# EAGLE board ir_module (EAGLE 6.1)
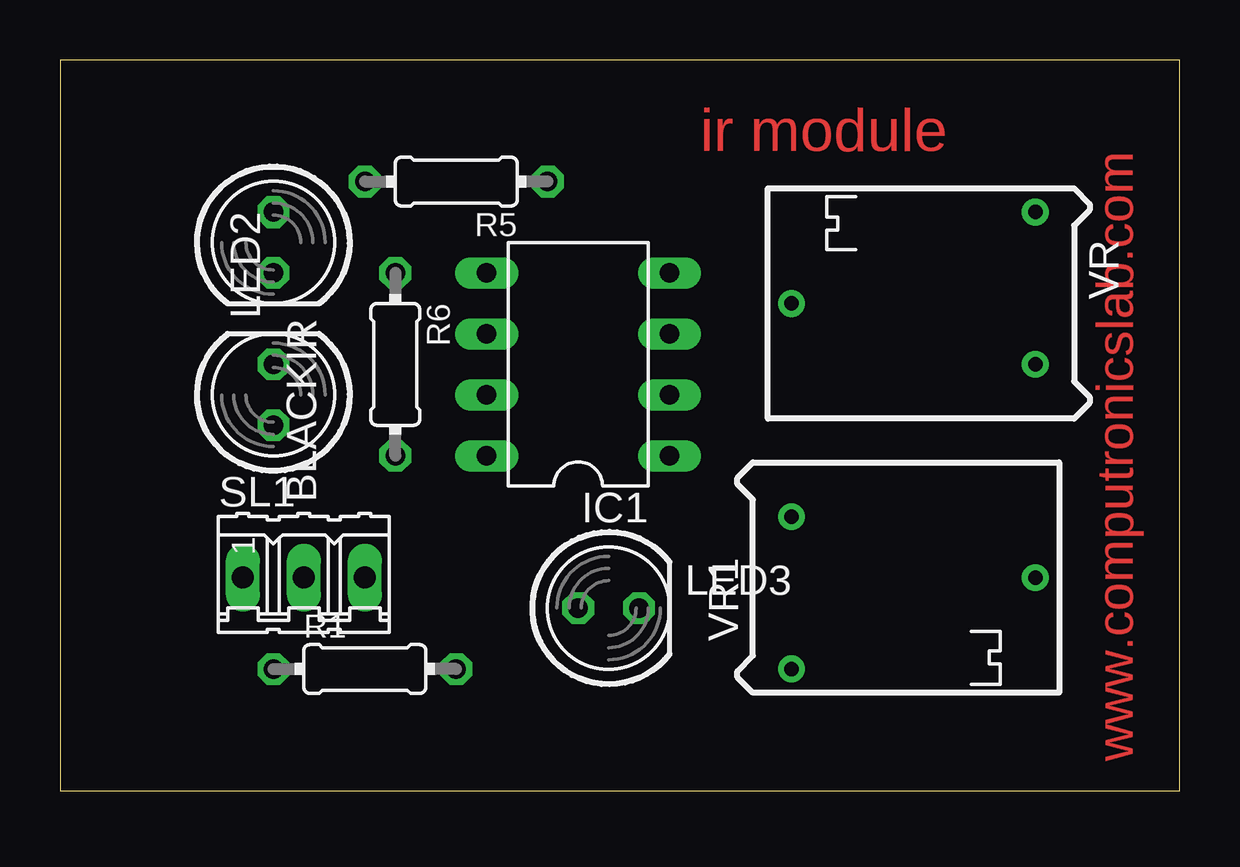
[diagram p0: board, top side]
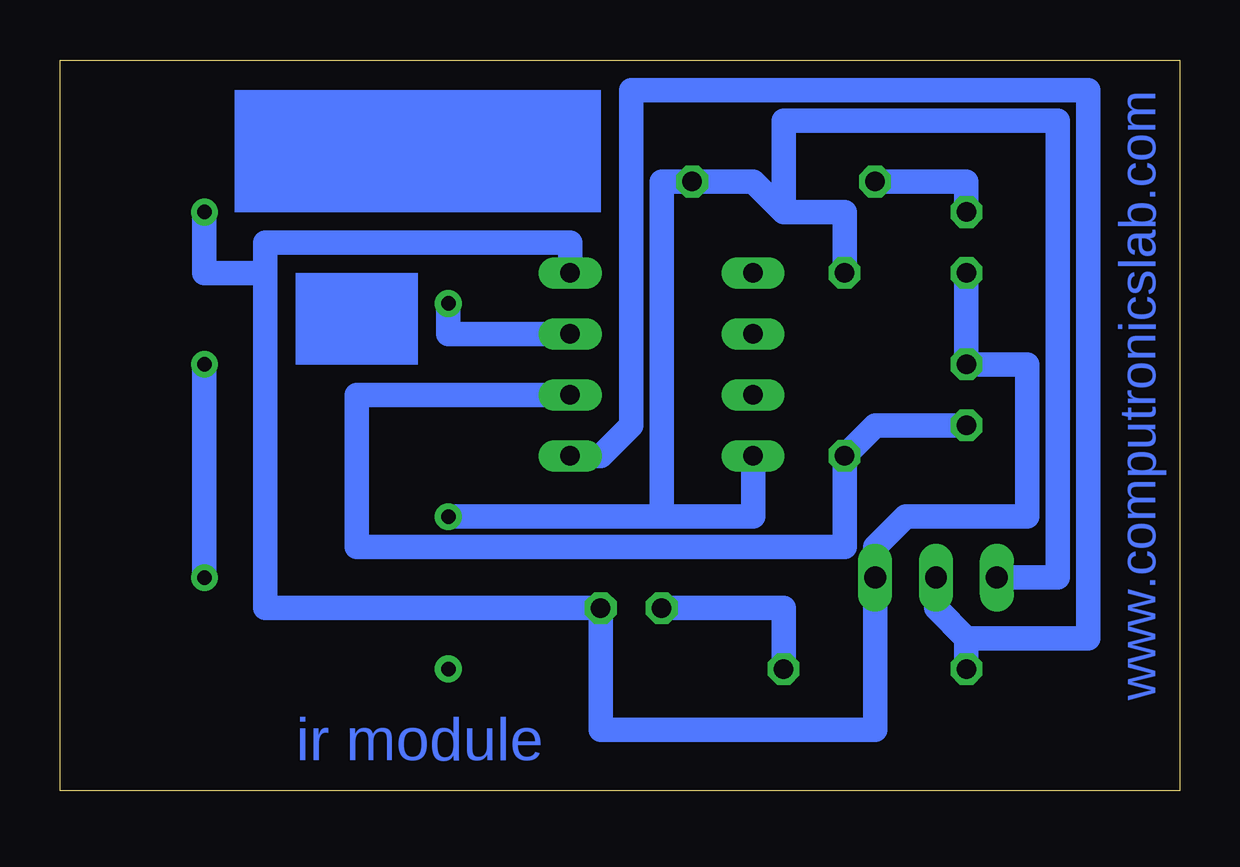
[diagram p1: board, bottom side, seen from below]

Size 46.66 x 30.47 mm. Coordinates in mm from the lower left corner, seen from the top.
Outline: 0,0 46.66,0 46.66,30.47 0,30.47 0,0
Copper layers (1*16): Top 0.035mm / dielectric 1.5mm / Bottom 0.035mm
Design rules: minimum track width 40mil, minimum drill 24mil, track to track 8mil, track to pad 8mil, pad to pad 8mil, via to via 8mil, smd to smd 8mil, copper to edge 40mil, drill to drill 8mil, minimum pad ring 10mil, minimum via ring 8mil, stop-mask expansion 4mil, vias tented up to drill 0mil, thermal gap 10mil

## Footprints (pad centres in the part's own frame; a part is rotated, then mirrored left to right if it is on the bottom)
LED5MM = drill 0.813 octagon: A -1.27,0; K 1.27,0
DIL-08 = drill 0.813 long: 1 -3.81,-3.81; 2 -1.27,-3.81; 3 1.27,-3.81; 4 3.81,-3.81; 5 3.81,3.81; 6 1.27,3.81; 7 -1.27,3.81; 8 -3.81,3.81
0204/7 = drill 0.813 octagon: 1 -3.81,0; 2 3.81,0
03P = drill 0.914 long: 1 -2.54,0; 2 0,0; 3 2.54,0
RTRIM64P = drill 0.61: 1 -2.54,-3.81; 2 7.62,0; 3 -2.54,2.54

## Placement (x,y rotation side)
BLACKIR  5mm  [LED5MM]  8.89,22.86 270 top
IC1  358  [DIL-08]  21.59,17.78 90 top
LED2  5mm  [LED5MM]  8.89,16.51 90 top
LED3  5mm  [LED5MM]  22.86,7.62 0 top
R1  1K  [0204/7]  12.7,5.08 0 top
R5  1K  [0204/7]  16.51,25.4 180 top
R6  10K  [0204/7]  13.97,17.78 270 top
SL1  [03P]  10.16,8.89 0 top
VR  50k  [RTRIM64P]  38.1,20.32 180 top
VR1  100E  [RTRIM64P]  33.02,8.89 0 top

## Library data of the parts
BLACKIR LED2 LED3 = led
IC1 = st-microelectronics; MF: Arrow Electronics; MPN: NE555N; OC_FARNELL: 1467742; OC_NEWARK: 89K1486
R1 R5 R6 = rcl
SL1 = con-amp-quick; OC_FARNELL: unknown; OC_NEWARK: unknown
VR VR1 = resistor

## Nets
N$2: IC1.8 R5.1 R6.1 SL1.1 VR1.3
N$3: IC1.1 R1.1 SL1.2
N$4: LED3.A R1.2
N$5: BLACKIR.A R5.2
N$6: IC1.3 VR.2
N$9: IC1.2 LED2.A R6.2
N$10: VR1.2 VR.3
N$11: BLACKIR.K IC1.4 LED2.K LED3.K SL1.3 VR.1

## Tracks (layer width: path | path; a pad name or v marks a point on that pad's centre or on a via)
N$2
  Bottom 1.016: 21.59,11.43 VR1.3 | IC1.8 17.78,11.43 21.59,11.43 | 16.51,24.13 17.78,25.4 R5.1 21.59,25.4 21.59,11.43 | 16.51,24.13 13.97,24.13 R6.1 | SL1.1 5.08,8.89 5.08,27.94 16.51,27.94 16.51,24.13
N$3
  Bottom 1.016: 8.89,6.35 R1.1 | 8.89,6.35 10.16,7.62 SL1.2 | IC1.1 24.13,13.97 22.86,15.24 22.86,29.21 7.62,29.21 3.81,29.21 3.81,27.94 3.81,25.4 3.81,6.35 8.89,6.35
N$4
  Bottom 1.016: R1.2 16.51,7.62 LED3.A
N$5
  Bottom 1.016: BLACKIR.A 8.89,25.4 R5.2
N$6
  Bottom 1.016: VR.2 30.48,19.05 IC1.3
N$9
  Bottom 1.016: LED2.A 12.7,15.24 R6.2 13.97,10.16 34.29,10.16 34.29,16.51 IC1.2
N$10
  Bottom 1.016: VR.3 VR1.2
N$11
  Bottom 1.016: VR.1 40.64,21.59 38.1,21.59 | IC1.4 25.4,22.86 38.1,22.86 38.1,21.59 | BLACKIR.K LED2.K 6.35,17.78 6.35,11.43 11.43,11.43 12.7,10.16 SL1.3 12.7,2.54 24.13,2.54 LED3.K 38.1,7.62 38.1,21.59
(copper drawn outside any net)
  shapes: Bottom area x2

## Text on the board
Top: ir module | www.computronicslab.com
Bottom: www.computronicslab.com | ir module